# Altium PCB PWR8.PcbDoc
Units mil, origin at the board's own origin, x right, y up, seen from the top; angles counter-clockwise.
Board outline 9688.98 x 2814.96 mil, 2 copper layers (Top Layer, Bottom Layer); 79 components, 16 nets, 284 pads, 25 vias.
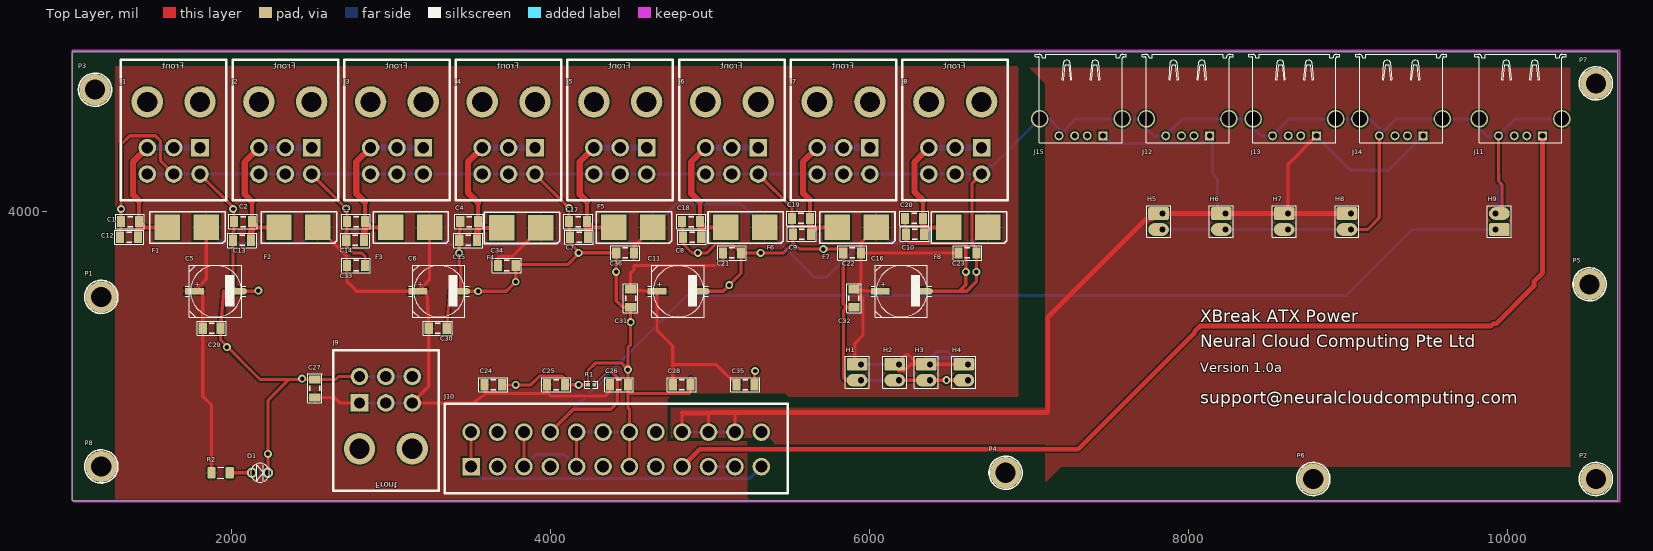
[diagram p0: Top Layer view]
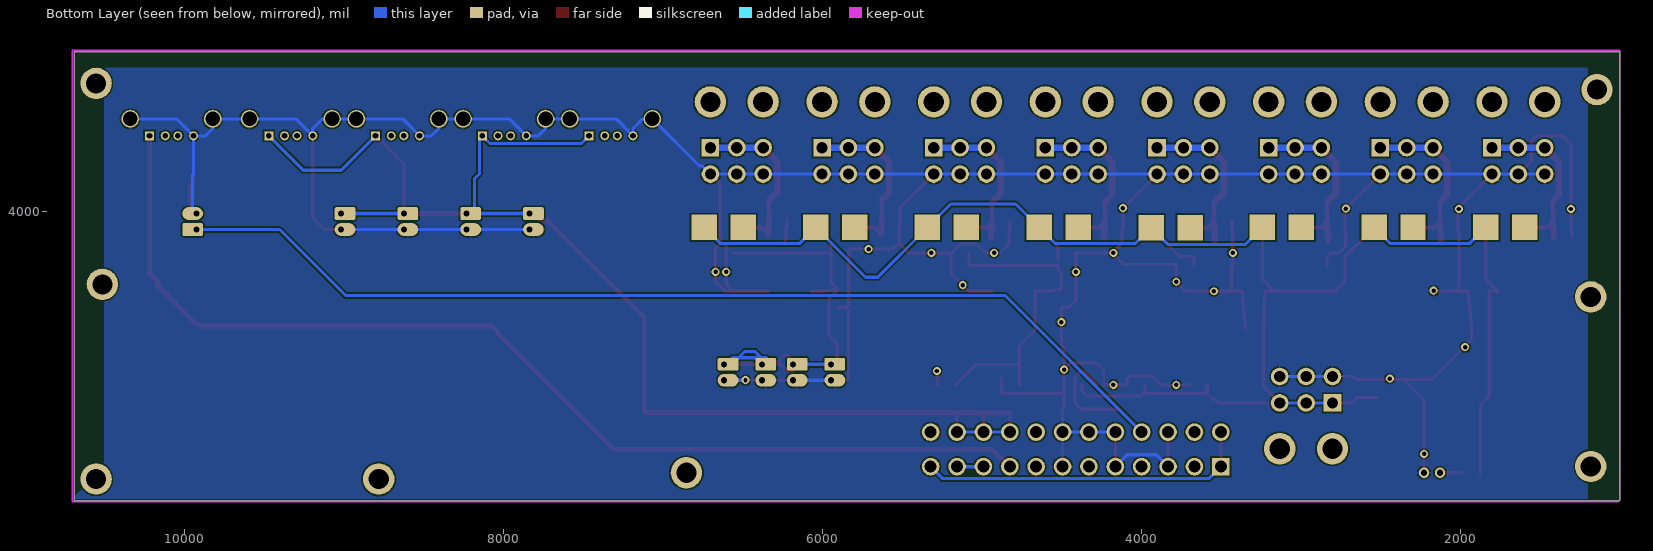
[diagram p1: Bottom Layer view, seen from below]

## Layer stack, top to bottom
Top Solder: solder mask 0.4, Solder Resist, Dk 3.5
Top Layer: signal copper 1.4
Dielectric 1: dielectric 12.6, FR-4, Dk 4.8
Bottom Layer: signal copper 1.4
Bottom Solder: solder mask 0.4, Solder Resist, Dk 3.5

## Board outline
1000,2185.04 10688.98,2185.04 10688.98,5000 1000,5000

## Design rules (kind name [scope] priority, off if disabled: settings)
Clearance [All] p1: gap=10
PolygonConnect [All] p1: connectstyle=Relief reliefconductorwidth=10 reliefentries=4 polygonreliefangle="90 Angle" airgapwidth=10
RoutingVias [All] p1: holewidth=28 width=50 viastyle="Through Hole" minholewidth=28 minwidth=50 maxholewidth=28 maxwidth=50
SMDNeckDown [All] p1: percent=50.000
SolderMaskExpansion [All] p1: expansion=4
Width Width_12VFinal [InNetClass('12VFinalNets')] p1: maxlimit=78.74 minlimit=10 preferedwidth=39.37 minimp=50.000000 maximp=50.000000 favimp=50.000000
Width [All] p2: maxlimit=50 minlimit=10 preferedwidth=19.68 minimp=50.000000 maximp=50.000000 favimp=50.000000
30 further rules are at their usual default settings.

## Classes and differential pairs
net class 12VFinalNets: V12P1 V12P2 V12P3 V12P4 V12P5 V12P6 V12P7 V12P8

## Components (designator, comment, footprint, x,y, rotation, side; value= is the part's Value field where it differs from the comment)
C1 "1UF 25V X7R" C1206YageoX7R 1417.32,3937.01 r180 top
C2 "1UF 25V X7R" C1206YageoX7R 2125.98,3937.01 r180 top
C3 "1UF 25V X7R" C1206YageoX7R 2834.65,3937.01 r180 top
C4 "1UF 25V X7R" C1206YageoX7R 3543.31,3937.01 r180 top
C5 "47uF-50V" PANACAP-E-GENERIC 1900,3500 r0 top
C6 "47uF-50V" PANACAP-E-GENERIC 3300,3500 r0 top
C7 "1UF 25V X7R" C1206YageoX7R 4232.28,3838.58 r180 top
C8 "1UF 25V X7R" C1206YageoX7R 4940.94,3838.58 r180 top
C9 "1UF 25V X7R" C1206YageoX7R 5629.92,3858.27 r180 top
C10 "1UF 25V X7R" C1206YageoX7R 6338.58,3858.27 r180 top
C11 "47uF-50V" PANACAP-E-GENERIC 4800,3500 r0 top
C12 "0.1UF 50V X7R" C1206YageoX7R 1299.21,3838.58 r0 top
C13 "0.1UF 50V X7R" C1206YageoX7R 2007.87,3818.9 r0 top
C14 "0.1UF 50V X7R" C1206YageoX7R 2716.54,3818.9 r0 top
C15 "0.1UF 50V X7R" C1206YageoX7R 3425.2,3818.9 r0 top
C16 "47uF-50V" PANACAP-E-GENERIC 6200,3500 r0 top
C17 "0.1UF 50V X7R" C1206YageoX7R 4114.17,3937.01 r0 top
C18 "0.1UF 50V X7R" C1206YageoX7R 4822.83,3937.01 r0 top
C19 "0.1UF 50V X7R" C1206YageoX7R 5511.81,3956.69 r0 top
C20 "0.1UF 50V X7R" C1206YageoX7R 6220.47,3956.69 r0 top
C21 "1UF 25V X7R" C1206YageoX7R 5078.74,3740.16 r0 top
C22 "1UF 25V X7R" C1206YageoX7R 5944.88,3740.16 r180 top
C23 "1UF 25V X7R" C1206YageoX7R 6555.12,3740.16 r0 top
C24 "1UF 25V X7R" C1206YageoX7R 3582.68,2913.39 r0 top
C25 "1UF 25V X7R" C1206YageoX7R 3976.38,2913.39 r0 top
C26 "1UF 25V X7R" C1206YageoX7R 4370.08,2913.39 r0 top
C27 "1UF 25V X7R" C1206YageoX7R 2519.68,2834.65 r90 top
C28 "1UF 25V X7R" C1206YageoX7R 4763.78,2913.39 r0 top
C29 "0.1UF 50V X7R" C1206YageoX7R 1929.13,3267.72 r180 top
C30 "0.1UF 50V X7R" C1206YageoX7R 3346.46,3267.72 r180 top
C31 "0.1UF 50V X7R" C1206YageoX7R 4500,3400 r90 top
C32 "0.1UF 50V X7R" C1206YageoX7R 5900,3400 r90 top
C33 "0.1UF 50V X7R" C1206YageoX7R 2834.65,3661.42 r180 top
C34 "0.1UF 50V X7R" C1206YageoX7R 3779.53,3661.42 r180 top
C35 "0.1UF 50V X7R" C1206YageoX7R 5275.59,2913.39 r180 top
C36 "0.1UF 50V X7R" C1206YageoX7R 4409.45,3740.16 r0 top
D1 "LED-GREEN-3MM" LED-3MM-GREEN 2125.98,2362.2 r0 top
F1 "74279223560" 74279223560 1800,3900 r180 top
F2 "74279223560" 74279223560 2500,3900 r180 top
F3 "74279223560" 74279223560 3200,3900 r180 top
F4 "74279223560" 74279223560 3897.64,3897.64 r180 top
F5 "74279223560" 74279223560 4600,3900 r180 top
F6 "74279223560" 74279223560 5300,3900 r180 top
F7 "74279223560" 74279223560 6000,3900 r180 top
F8 "74279223560" 74279223560 6700,3900 r180 top
H1 "Header" HDR_1x2_Offset 5944.88,2992.13 r0 top
H2 "Header" HDR_1x2_Offset 6181.1,2992.13 r0 top
H3 "Header" HDR_1x2_Offset 6377.95,2992.13 r0 top
H4 "Header" HDR_1x2_Offset 6614.17,2992.13 r0 top
H5 "Header" HDR_1x2_Offset 7834.65,3937.01 r0 top
H6 "Header" HDR_1x2_Offset 8228.35,3937.01 r0 top
H7 "Header" HDR_1x2_Offset 8622.05,3937.01 r0 top
H8 "Header" HDR_1x2_Offset 9015.75,3937.01 r0 top
H9 "Header" HDR_1x2_Offset 9921.26,3937.01 r180 top
J1 "0455580003" 45558 1800,4400 r0 top
J2 "0455580003" 45558 2500,4400 r0 top
J3 "0455580003" 45558 3200,4400 r0 top
J4 "0455580003" 45558 3900,4400 r0 top
J5 "0455580003" 45558 4600,4400 r0 top
J6 "0455580003" 45558 5300,4400 r0 top
J7 "0455580003" 45558 6000,4400 r0 top
J8 "0455580003" 45558 6700,4400 r0 top
J9 "0455580003" 45558 2800,2800 r180 top
J10 "ATX Power" 46991-1024 3500,2400 r180 top
J11 "WE-Communication Connectors 61400416021" 61400416021 10078.74,4527.56 r180 top
J12 "WE-Communication Connectors 61400416021" 61400416021 7992.13,4527.56 r180 top
J13 "WE-Communication Connectors 61400416021" 61400416021 8661.42,4527.56 r180 top
J14 "WE-Communication Connectors 61400416021" 61400416021 9330.71,4527.56 r180 top
J15 "WE-Communication Connectors 61400416021" 61400416021 7322.83,4527.56 r180 top
P1 "CopperScrewM3" M3Screw 1181.1,3464.57 r0 top
P2 "CopperScrewM3" M3Screw 10551.18,2322.83 r0 top
P3 "CopperScrewM3" M3Screw 1141.73,4763.78 r0 top
P4 "CopperScrewM3" M3Screw 6850.39,2362.2 r0 top
P5 "CopperScrewM3" M3Screw 10511.81,3543.31 r0 top
P6 "CopperScrewM3" M3Screw 8779.53,2322.83 r0 top
P7 "CopperScrewM3" M3Screw 10551.18,4803.15 r0 top
P8 "CopperScrewM3" M3Screw 1181.1,2401.57 r0 top
R1 "Thick Film" RESC1005X40N 4251.97,2913.39 r180 top
R2 "560 Ohm .25 1206" RESC3216X70N 1929.13,2362.2 r0 top

## Footprints (in the part's own frame and the unit in brackets; to place one, negate y for a bottom-side part, rotate by r counter-clockwise, add the part's x,y. Pads: shape width x height; smd on the part's side, far side on the other; paste and mask are expansions set on the pad)
45558 [mm] "6 CKT R/A Header Mini Fit Jr PCI-E Power"
  rect 2.8x2.8 hole 1.8: 1(0,0)
  round 2.8 hole 1.8: 2(-4.2,0) 3(-8.4,0) 4(0,-4.2) 5(-4.2,-4.2) 6(-8.4,-4.2)
  round 5 hole 3.2: 7(0,7.3) 8(-8.4,7.3)
  silkscreen extent -12.6,-8.4 4.2,14
46991-1024 [mm] "MINIFIT RTC Right Angle Header W/O PEG"
  rect 2.8x2.8 hole 1.9: 1(0,0)
  round 2.8 hole 1.9: 2(-4.2,0) 3(-8.4,0) 4(-12.6,0) 5(-16.8,0) 6(-21,0) 7(-25.2,0) 8(-29.4,0) 9(-33.6,0) 10(-37.8,0) 11(-42,0) 12(-46.2,0) 13(0,-5.5) 14(-4.2,-5.5) 15(-8.4,-5.5) 16(-12.6,-5.5) 17(-16.8,-5.5) 18(-21,-5.5) 19(-25.2,-5.5) 20(-29.4,-5.5) 21(-33.6,-5.5) 22(-37.8,-5.5) 23(-42,-5.5) 24(-46.2,-5.5)
  silkscreen extent -50.4,-10 4.2,4.2
61400416021 [mm] "4 pins"
  rect 1.428x1.428 hole 0.92: 1(-3.5,1.35)
  round 1.428 hole 0.92: 2(-1,1.35) 3(1,1.35) 4(3.5,1.35)
  round 2.8 hole 2.3: Z1(-6.57,-1.35) Z2(6.57,-1.35)
  silkscreen extent -7.25,-11.63 7.25,2.47, body extent -7.9,-11.63 7.9,2.47, height 7.71
74279223560 [mm] "WURTH ELEKTRONIK  74279223560  FERRITE BEAD, 4000UOHM, 10A, 1612"
  rect 4.06x4.06 all layers, no hole: 1(-1,0) 2(5.2,0)
  silkscreen extent -4,-2.5 8,2.5
C1206YageoX7R [mm] "Chip Capacitor, 2-Leads, Body 3.20x1.60mm, IPC Medium Density"
  rect 1.3x1.8 smd: 1(0,0) 2(2.85,0)
  silkscreen extent -0.86,-1.14 3.73,1.14, body extent -0.25,-0.87 3.1,0.87, height 1.8
HDR_1x2_Offset [mil]
  rrect25% 130x80 smd: 1(-25,50)
  rrect25% 130x80 smd far side: 1(-25,50)
  rrect25% 60x60 hole 38: 1(0,50)
  oval 130x80 smd: 2(-25,-50)
  oval 130x80 smd far side: 2(-25,-50)
  round 60 hole 38: 2(0,-50)
  silkscreen extent -100,-100 50,100
LED-3MM-GREEN [mil]
  round 65 hole 40: A(0,0) K(100,0)
  silkscreen extent -9,-59 109,59, body extent -15,-63 114,67, height 250
M3Screw [mm] "M3ScrewHole"
  round 5 hole 3.2: 1(0,0)
  silkscreen extent -2.64,-2.64 2.64,2.64
PANACAP-E-GENERIC [mm]
  rect 3x1 smd: +(-3.429,0)
  oval 3x1 smd: -(3.429,0)
  silkscreen extent -4.87,-4.15 4.75,4.15, body extent -4.63,-4.15 4.37,4.15, height 6.2
RESC1005X40N [mm] "Chip Resistor, Body 1.0x0.5mm, EIA 0402, IPC Medium Density"
  round 0.2 on Mech15: 0(0,0)
  rrect20% 0.6x0.6 smd: 1(-0.5,0) 2(0.5,0)
  Top Layer pour cut-out: -0.325,0.375 -0.2,0.5 0.2,0.5 0.325,0.375 0.325,-0.375 0.2,-0.5 -0.2,-0.5 -0.325,-0.375
  silkscreen extent -1.05,-0.55 1.05,0.55, body extent -0.52,-0.27 0.53,0.28, height 0.4
RESC3216X70N [mm] "Chip Resistor, Body 3.2x1.6mm, EIA 1206, IPC Medium Density"
  round 0.508 on Mech15: 0(0,0)
  rrect25% 1.3x1.8 smd: 1(-1.45,0) 2(1.45,0)
  silkscreen extent -0.51,-0.89 0.51,0.89, body extent -1.62,-0.82 1.63,0.83, height 0.69

## Part data
C1 C2 C3 C4 C7 C8 C9 C10 C21 C22 C23 C24 C25 C26 C27 C28: library part CC1206KKX7R8BB105, "CAP CER 1UF 25V X7R 1206 Yageo CC1206KKX7R8BB105"
C5 C6 C11 C16: library part PANACAP-47UF-50V-FK, "GENERIC CAPACITOR POLARISED"
C12 C13 C14 C15 C17 C18 C19 C20 C29 C30 C31 C32 C33 C34 C35 C36: library part CC1206KRX7R9BB104, "CAP CER 0.1UF 50V X7R 1206 YAGEO CC1206KRX7R9BB104"
F1 F2 F3 F4 F5 F6 F7 F8: "Wurth 74279223560 Ferrite Bead 4000 uohm 10Amps"
H1 H2 H3 H4 H5 H6 H7 H8 H9: library part Header2P, "Header, 2-pin"
J10: library part 46991-2024, "Mini-Fit JR LCP RA HDR NOPEG 24C"
J11 J12 J13 J14 J15: "WR-COM USB RA Type A"
R1: library part RES_4K7_0402_1%, "Resistor SMD chip 4.7K Ohm 0.1W 1% 0402"
R2: library part RC1206JR-07560RL, "Resistor, SMD chip RC1206JR-07560RL RES SMD 560 OHM 5% 1/4W 1206"

## Via types
v1: diameter 50, hole 28, Top Layer to Bottom Layer, 25 vias

## Nets (pads, with @x,y where several pads share a name; then routed paths per layer and width w, separated by ;. In a path a pad name is that pad's centre, name@x,y a point inside that pad or via, vN(x,y) a via of type N, cw(c..) or ccw(c..) an arc to the next point about the centre after c; other vN are vias at no path point)
GND: C1.2 C2.2 C3.2 C4.2 C5.- C6.- C7.2 C8.2 C9.2 C10.2 C11.- C12.1 C13.1 C14.1 C15.1 C16.- C17.1 C18.1 C19.1 C20.1 C21.2 C22.2 C23.2 C24.2 C25.2 C26.2 C27.2 C28.2 C29.1 C30.1 C31.1 C32.1 C33.1 C34.1 C35.1 C36.1 D1.K H1.2 H2.2 H3.2 H4.2 H5.2 H6.2 H7.2 H8.2 H9.2 J1.4 J1.5 J1.6 J2.4 J2.5 J2.6 J3.4 J3.5 J3.6 J4.4 J4.5 J4.6 J5.4 J5.5 J5.6 J6.4 J6.5 J6.6 J7.4 J7.5 J7.6 J8.4 J8.5 J8.6 J9.4 J9.5 J9.6 J10.3 J10.5 J10.7 J10.15 J10.17 J10.18 J10.19 J10.24 J11.4 J11.Z1 J11.Z2 J12.4 J12.Z1 J12.Z2 J13.4 J13.Z1 J13.Z2 J14.4 J14.Z1 J14.Z2 J15.4 J15.Z1 J15.Z2 R1.2 | length 30518.3
  Top Layer w11.81: R1.2 4232.28,3003.28
  Top Layer w19.68: C12.1 1299.21,3884 1305.12,3889.91 C1.2 1305.12,4420.12 1360,4475 1520,4475 1552,4443 1552,4317.29 J1.5 ; J1.4 2013.78,4020.87 C2.2 2013.78,3880.91 2007.87,3875 C13.1 2007.87,3527.13 C5.- ; v1(2165.35,3503.94) 2161.42,3500 C5.- ; D1.K 2225.98,2815.83 2357,2946.85 ; J2.4 2722.44,4012.2 C3.2 2722.44,3880.91 2716.54,3875 C14.1 2716.54,3783.46 2760,3740 2814.65,3740 2834.65,3720 C33.1 ; J9.4 2668.5,2965.35 2650,2946.85 C27.2 2357,2946.85 ; C30.1 3366.46,3500 C6.- ; C4.2 3431.1,3880.91 3425.2,3875 C15.1 3425.2,3663.8 3435,3654 C6.- ; C24.2 3694.88,2913 3874,2913 3930,2969 4070,2969 4088.58,2950.42 C25.2 R1.2 ; J10.3 J10.15 ; J4.4 v1(4114.17,4020.47) C17.1 4114.17,3889.9 4120.08,3884 C7.2 4120.08,3800 v1@4179.08,3741 ; J10.5 J10.17 ; 4232.28,3003.28 4280,3051 4440,3051 v1(4482.28,3008.72) ; 4409.45,3700.79 C36.1 4409.45,3440 4449.45,3400 C31.1 4500,3164.72 4482.28,3147 v1(4482.28,3008.72) ; C36.1@4409.45,3741 v1@4179.08,3741 ; J10.7 J10.19 4492.13,2760 4482.28,2769.84 4482.28,2870 ; C18.1 4822.83,3889.91 4828.74,3884 C8.2 4828.74,3796.26 4884.84,3740.16 4977.46,3740.16 5033.31,3796 5134.94,3796 C21.2@5190.94,3740 ; 4875.98,2954.98 C28.2 4875.98,2870 4863.98,2858 4494.28,2858 4482.28,2870 ; C11.- 5080,3500 ; v1@5125,3545 5080,3500 ; C35.1 5275.59,2995.59 v1(5280,3000) ; J6.4 5511.81,4022.83 C19.1 5511.81,3909.9 5517.72,3904 C9.2 5517.72,3800 ; C32.1 5855,3400 ; H1.2@5944.88,2942.13 5919.88,2942.13 5850,2942.13 5835,2957.13 5835,3380 5855,3400 ; H2.2@6156.1,2942.13 6181.1,2942.13 6352.95,2942.13 6377.95,2942.13 v1(6480,2942.13) H4.2@6589.17,2942.13 ; C20.1 6220.47,3909.91 6226.38,3904 C10.2 6226.38,3820 6247.38,3799 6590,3799 6601,3788 6601,3541 6560,3500 ; C16.- 6560,3500 ; J8.4 6639,4173.65 6639,3800 6667.32,3771.68 C23.2 6667.32,3560 6607.32,3500 6560,3500 ; H5.2@7809.65,3887.01 H5.2@7834.65,3887.01 ; H6.2@8203.35,3887.01 H6.2@8228.35,3887.01 ; H7.2@8597.05,3887.01 H7.2@8622.05,3887.01 ; H8.2@8990.75,3887.01 9015.75,3887.01 9120,3887.01 9192.91,3959.92 J14.4 ; J11.4 9940.94,4191.06 9962,4170 9962,3987.01 H9.2@9946.26,3987.01 ; C5.- 1949.13,3500 C29.1 1929.13,3194 2176.28,2946.85 2357,2946.85 ; C6.- 3720,3500 v1(3779.53,3559.53) C34.1 3779.53,3667 4105.08,3667 v1@4179.08,3741 ; 4482.28,2870 C26.2 v1(4482.28,3008.72) ; 5080,3500 5190.94,3610.94 C21.2@5190.94,3740 ; C21.2@5190.94,3740 5457.72,3740 5517.72,3800 ; 5517.72,3800 5560,3764 5832.68,3764 C22.2 5832.68,3420 5852.68,3400 5855,3400
  Bottom Layer w19.68: J1.6 J1.5 J1.4 J2.6 J2.5 J2.4 J3.6 J3.5 J3.4 J4.6 J4.5 J4.4 J5.6 J5.5 J5.4 J6.6 J6.5 J6.4 J7.6 J7.5 J7.4 J8.6 J8.5 J8.4 6750.35,4285 6768.46,4285 J15.Z2 7124.32,4580.71 7185.03,4520 J15.4 7291.33,4580.71 J15.Z1 J12.Z2 7733.47,4520 7779.06,4474.41 J12.4 7960.63,4580.71 J12.Z1 J13.Z2 8402.76,4520 8448.35,4474.41 J13.4 8629.92,4580.71 J13.Z1 J14.Z2 9132.2,4580.71 9192.91,4520 J14.4 9299.21,4580.71 J14.Z1 J11.Z2 9820.08,4520 9865.67,4474.41 J11.4 ; J9.4 J9.5 J9.6 ; J10.3 3905.71,2475 4086.42,2475 J10.5 ; J10.17 J10.18 J10.19 ; H1.2@5919.88,2942.13 5944.88,2942.13 6156.1,2942.13 H2.2@6181.1,2942.13 ; H3.2@6352.95,2942.13 H3.2@6377.95,2942.13 ; v1(6480,2942.13) 6589.17,2942.13 H4.2@6614.17,2942.13 ; H5.2@7809.65,3887.01 7834.65,3887.01 8203.35,3887.01 8228.35,3887.01 8597.05,3887.01 8622.05,3887.01 8990.75,3887.01 H8.2@9015.75,3887.01 ; H9.2@9921.26,3987.01 9946.26,3987.01 9946.26,4228 9940.94,4233.32 J11.4 ; J11.Z1 10047.24,4580.71 J11.4
  other v1: 2225.98,2480.32 3779.53,2913.39 4173.23,2913.39 2440.94,2952.76 1968.5,3149.61 4500,3307.09 3543.31,3500 5118.11,3538.11 4409.45,3622.05 6601,3622.05 6667.32,3622.05 3425.2,3740.16 4173.23,3740.16 4921.26,3740.16 5314.96,3740.16 5708.66,3764 1305.12,4015.75 2007.87,4015.75 2716.54,4018.11
NetD1_A: D1.A R2.2 | length 139.8
  Top Layer w19.68: R2.2 D1.A
PWRON: H9.1 J10.16 R1.1 | length 7348.4
  Top Layer w11.81: R1.1 4351.27,2993
  Top Layer w19.68: J10.16 4139.53,2760 4376,2760 4416,2800 4416,2960 4383,2993 4351.27,2993 ; H9.1@9921.26,3887.01 H9.1@9946.26,3887.01
  Bottom Layer w19.68: J10.16 4852.53,3473 8987,3473 9401.01,3887.01 9921.26,3887.01 H9.1@9946.26,3887.01
V3V3: J10.1 J10.12 J10.13 | length 2097.6
  Top Layer w19.68: J10.1 J10.13
  Bottom Layer w19.68: J10.1 3575,2325 5243.9,2325 J10.12
V5: H5.1 H6.1 H7.1 H8.1 J10.21 J10.22 J10.23 J12.1 J13.1 J14.1 J15.1 | length 9203.3
  Top Layer w19.68: J10.21 4822.83,2737.17 ; J10.22 4988.19,2735.36 4990,2737.17 5007.17,2737.17 5010,2740 ; 5150,2740 5153.54,2736.46 J10.23 ; 7110,2740 7115,2745 ; 7724.8,3946.85 7769.49,3946.85 7809.65,3987.01 H5.1@7834.65,3987.01 ; H6.1@8203.35,3987.01 H6.1@8228.35,3987.01 ; H7.1@8597.05,3987.01 8622.05,3987.01 8622.05,4297.25 J13.1
  Top Layer w30: 4822.83,2737.17 4990,2737.17 ; 5010,2740 5150,2740 7110,2740 ; 7115,2745 7115,3337.05 7724.8,3946.85 ; H5.1@7834.65,3987.01 H6.1@8203.35,3987.01 ; H6.1@8228.35,3987.01 H7.1@8597.05,3987.01 ; H7.1@8622.05,3987.01 H8.1@8990.75,3987.01
  Bottom Layer w19.68: J10.21 J10.22 J10.23 ; J15.1 7509.03,4426 8081.51,4426 J12.1 8148,4474.41 8148,4237 8178,4207 H6.1@8178,3987.01 ; H5.1@7809.65,3987.01 7834.65,3987.01 H6.1@8178,3987.01 ; H6.1@8228.35,3987.01 8203.35,3987.01 H6.1@8178,3987.01 ; H7.1@8597.05,3987.01 8622.05,3987.01 8990.75,3987.01 H8.1@9015.75,3987.01 ; J13.1 9014.62,4259 9253.09,4259 J14.1
V5SB: J10.9 J11.1 | length 6777.3
  Top Layer w30: J10.9 4932.83,2510 7304.8,2510 8036.02,3241.22 8036.02,3248.52 8069.59,3282.09 9892.25,3282.09 9906.89,3296.73 9926.73,3296.73 10162.86,3532.86 10162.86,3560 10216.53,3613.67 J11.1
V12: C5.+ C6.+ C11.+ C16.+ C21.1 C22.1 C23.1 C24.1 C25.1 C26.1 C27.1 C28.1 C29.2 C30.2 C31.2 C32.2 C33.2 C34.2 C35.2 C36.2 F1.1 F2.1 F3.1 F4.1 F5.1 F6.1 F7.1 F8.1 H1.1 H2.1 H3.1 H4.1 J9.1 J9.2 J9.3 J10.10 J10.11 R2.1 | length 16953
  Top Layer w19.68: F1.1 1839.37,3574.37 C5.+ 1816.93,3500 C29.2 1816.93,2842.12 1872.05,2787 R2.1 ; C27.1 2642,2834.65 2676.65,2800 J9.1 ; F2.1 2722.44,3716.93 C33.2 2722.44,3560 2782.44,3500 C6.+ ; F3.1 3239.37,3574.37 C6.+ ; C34.2 3667.32,3704.32 3680,3717 3756.37,3717 F4.1 ; C25.1 3976.38,2870 ; C26.1 4370.08,2873.08 4340,2843 4000,2843 3976.38,2866.62 3976.38,2870 ; 4521.65,3700.79 4521.65,3782.28 F5.1 ; C28.1 4763.78,3040 ; C21.1 5078.74,3661.42 4521.65,3661.42 4521.65,3636.65 4500,3615 C31.2 4595.2,3500 C11.+ 4665,3255.78 4763.78,3157 4763.78,3040 ; C35.2 5036.77,3040 4763.78,3040 ; H1.1@5944.88,3042.13 5919.88,3042.13 5905,3042.13 5905,3172 5956,3223 5956,3456.2 C32.2 ; F7.1 5944.88,3805.51 C22.1 ; C16.+ 5995.2,3500 C32.2 ; H2.1@6156.1,3042.13 6162,3042.13 6219.87,3100 6241.87,3100 H3.1@6299.75,3042.13 ; H2.1@6181.1,3042.13 6181.1,3002 6214.87,3002 6255,3042.13 H3.1@6299.75,3042.13 ; C23.1 C22.1 ; H4.1@6614.17,3042.13 6589.17,3042.13 6377.95,3042.13 6352.95,3042.13 H3.1@6299.75,3042.13 ; C6.+ 3224.25,3500 C30.2 3234.25,2903.54 J9.3 3508,2800 3594.68,2858 ; 3594.68,2858 3582.68,2870 C24.1 3594.68,2858 ; 3594.68,2858 3964.38,2858 3976.38,2870 ; C32.2 5944.88,3557.09 C22.1
  Bottom Layer w19.68: F1.1 1939.37,3800 2439.37,3800 F2.1 ; J9.1 J9.2 J9.3 ; F3.1 3345.37,3794 3833.37,3794 F4.1 4034.65,3800 4539.37,3800 F5.1 4786.37,4047 5192.37,4047 F6.1 5651.37,3588 5727.37,3588 F7.1 6139.37,3800 6639.37,3800 F8.1 ; J10.10 J10.11 ; H1.1@5919.88,3042.13 5944.88,3042.13 6156.1,3042.13 H2.1@6181.1,3042.13 ; H3.1@6352.95,3042.13 6349,3042.13 6349,3083 6380.95,3083 ; H3.1@6377.95,3042.13 6377.95,3080 6380.95,3083 ; H4.1@6589.17,3042.13 H4.1@6564,3042.13 ; 6380.95,3083 6420.95,3123 6483.13,3123 6523.13,3083 ; 6380.95,3083 6523.13,3083 ; 6523.13,3083 6564,3083 H4.1@6564,3042.13 ; 6523.13,3083 H4.1@6564,3042.13
V12NEG: J10.14
V12P1: C1.1 C12.2 F1.2 J1.1 J1.2 J1.3 | length 1140.3
  Top Layer w25.59: 1417.32,4067 C1.1 1454.33,3900 F1.2
  Top Layer w39.37: C12.2 1411.42,3884 1417.32,3889.9 C1.1 ; 1417.32,4067 1380,4104.32 1380,4310.71 J1.3
  Bottom Layer w39.37: J1.3 J1.2 J1.1
V12P2: C2.1 C13.2 F2.2 J2.1 J2.2 J2.3 | length 1154.9
  Top Layer w25.59: 2125.98,4062 C2.1 2162.99,3900 F2.2
  Top Layer w39.37: C13.2 2120.08,3875 2125.98,3880.91 C2.1 ; 2125.98,4062 2080,4107.98 2080,4310.71 J2.3
  Bottom Layer w39.37: J2.3 J2.2 J2.1
V12P3: C3.1 C14.2 F3.2 J3.1 J3.2 J3.3 | length 1149.8
  Top Layer w25.59: 2834.65,4058 C3.1 2871.65,3900 F3.2
  Top Layer w39.37: C14.2 2828.74,3875 2834.65,3880.91 C3.1 ; 2834.65,4058 2780,4112.65 2780,4310.71 J3.3
  Bottom Layer w39.37: J3.3 J3.2 J3.1
V12P4: C4.1 C15.2 F4.2 J4.1 J4.2 J4.3 | length 1143.4
  Top Layer w25.59: 3543.31,4054 C4.1 3582.68,3897.64 F4.2
  Top Layer w39.37: C15.2 3537.4,3875 3543.31,3880.91 C4.1 ; 3543.31,4054 3480,4117.31 3480,4310.71 J4.3
  Bottom Layer w39.37: J4.3 J4.2 J4.1
V12P5: C7.1 C17.2 F5.2 J5.1 J5.2 J5.3 | length 1135
  Top Layer w25.59: 4226.38,4062 C17.2 4263.39,3900 F5.2
  Top Layer w39.37: C17.2 4226.38,3889.91 4232.28,3884 C7.1 ; 4226.38,4062 4180,4108.38 4180,4310.71 J5.3
  Bottom Layer w39.37: J5.3 J5.2 J5.1
V12P6: C8.1 C18.2 F6.2 J6.1 J6.2 J6.3 | length 1129.9
  Top Layer w25.59: 4935.04,4058 C18.2 4972.05,3900 F6.2
  Top Layer w39.37: C18.2 4935.04,3889.9 4940.94,3884 C8.1 ; 4935.04,4058 4880,4113.04 4880,4310.71 J6.3
  Bottom Layer w39.37: J6.3 J6.2 J6.1
V12P7: C9.1 C19.2 F7.2 J7.1 J7.2 J7.3 | length 1112.7
  Top Layer w25.59: C19.2 5624.02,4073 ; C9.1 5671.65,3900 F7.2
  Top Layer w39.37: C19.2 5624.02,3909.91 5629.92,3904 C9.1 ; 5624.02,4073 5580,4117.02 5580,4310.71 J7.3
  Bottom Layer w39.37: J7.3 J7.2 J7.1
V12P8: C10.1 C20.2 F8.2 J8.1 J8.2 J8.3 | length 1107.7
  Top Layer w25.59: C20.2 6332.68,4069 ; C10.1 6380.31,3900 F8.2
  Top Layer w39.37: C20.2 6332.68,3909.9 6338.58,3904 C10.1 ; 6332.68,4069 6280,4121.68 6280,4310.71 J8.3
  Bottom Layer w39.37: J8.3 J8.2 J8.1
pads on no net: J1.7 J1.8 J2.7 J2.8 J3.7 J3.8 J4.7 J4.8 J5.7 J5.8 J6.7 J6.8 J7.7 J7.8 J8.7 J8.8 J9.7 J9.8 J10.2 J10.4 J10.6 J10.8 J10.20 J11.2 J11.3 J12.2 J12.3 J13.2 J13.3 J14.2 J14.3 J15.2 J15.3 P1.1 P2.1 P3.1 P4.1 P5.1 P6.1 P7.1 P8.1 R1.0 R2.0

## Polygon pours and split planes (outlines as drawn)
GND on Bottom Layer "BottomGnd" (solid, remove dead copper, pour order 2): 1200,4900 1200,2200 10700,2200 10500,2400 10500,4900
V5 on Top Layer "TOPVCC5X" (solid, remove dead copper, pour order 10): 4750,2770 4750,2580 5370,2580 5380,2570 5400,2550 5400,2540 7210,2540 7190,2560 7190,2770
V12 on Top Layer "TOPV12" (solid, remove dead copper, pour order 8): 1270,4910 1270,2190 5250,2190 5230,2210 5230,2560 4740,2560 4720,2540 4730,2550 4730,2720 4730,2820 4770,2860 4780,2860 5470,2860 5480,2850 5490,2840 6930,2840 6930,4900 6920,4910 1270,4910
V5 on Top Layer "TOPVCC5" (solid, remove dead copper, pour order 6): 7000,4900 7100,4800 7100,2300 7200,2400 10390,2400 10390,4900

## Keep-outs
Keep-Out Layer:
  lines w10: 1000,2190 1010,2180 10700,2180 10700,5010 1000,5010 1000,5000 1000,2190

## Silkscreen, mask and mechanical layers (free items; w line width, h text height)
Top Overlay:
  text "XBreak ATX Power" at 8070.87,3307.09 h78.74
  text "Neural Cloud Computing Pte Ltd" at 8070.87,3149.61 h78.74
  text "Version 1.0a" at 8070.87,2992.13 h59.06
  text "support@neuralcloudcomputing.com" at 8070.87,2795.28 h78.74

## Text inside footprints (layer, text, board x,y; h text height)
C5: Top Overlay "+" at 1763.19,3527.56 h35
C6: Top Overlay "+" at 3163.19,3527.56 h35
C11: Top Overlay "+" at 4663.19,3527.56 h35
C16: Top Overlay "+" at 6063.19,3527.56 h35
J1: Top Overlay "Front" at 1701.57,4896.06 h39.37
J2: Top Overlay "Front" at 2401.57,4896.06 h39.37
J3: Top Overlay "Front" at 3101.57,4896.06 h39.37
J4: Top Overlay "Front" at 3801.57,4896.06 h39.37
J5: Top Overlay "Front" at 4501.57,4896.06 h39.37
J6: Top Overlay "Front" at 5201.57,4896.06 h39.37
J7: Top Overlay "Front" at 5901.57,4896.06 h39.37
J8: Top Overlay "Front" at 6601.57,4896.06 h39.37
J9: Top Overlay "Front" at 2898.43,2303.94 h39.37 r180